# Altium PCB SZG-TEMPLATE-TXR.PcbDoc
Units mil, origin at the board's own origin, x right, y up, seen from the top; angles counter-clockwise.
Board outline 1968.5 x 2755.91 mil, 4 copper layers (L1-TOP, L2-GND, L3-PWR, L4-BOT), stack 59.85 mil thick; 29 components, 50 nets, 117 pads, 82 vias.
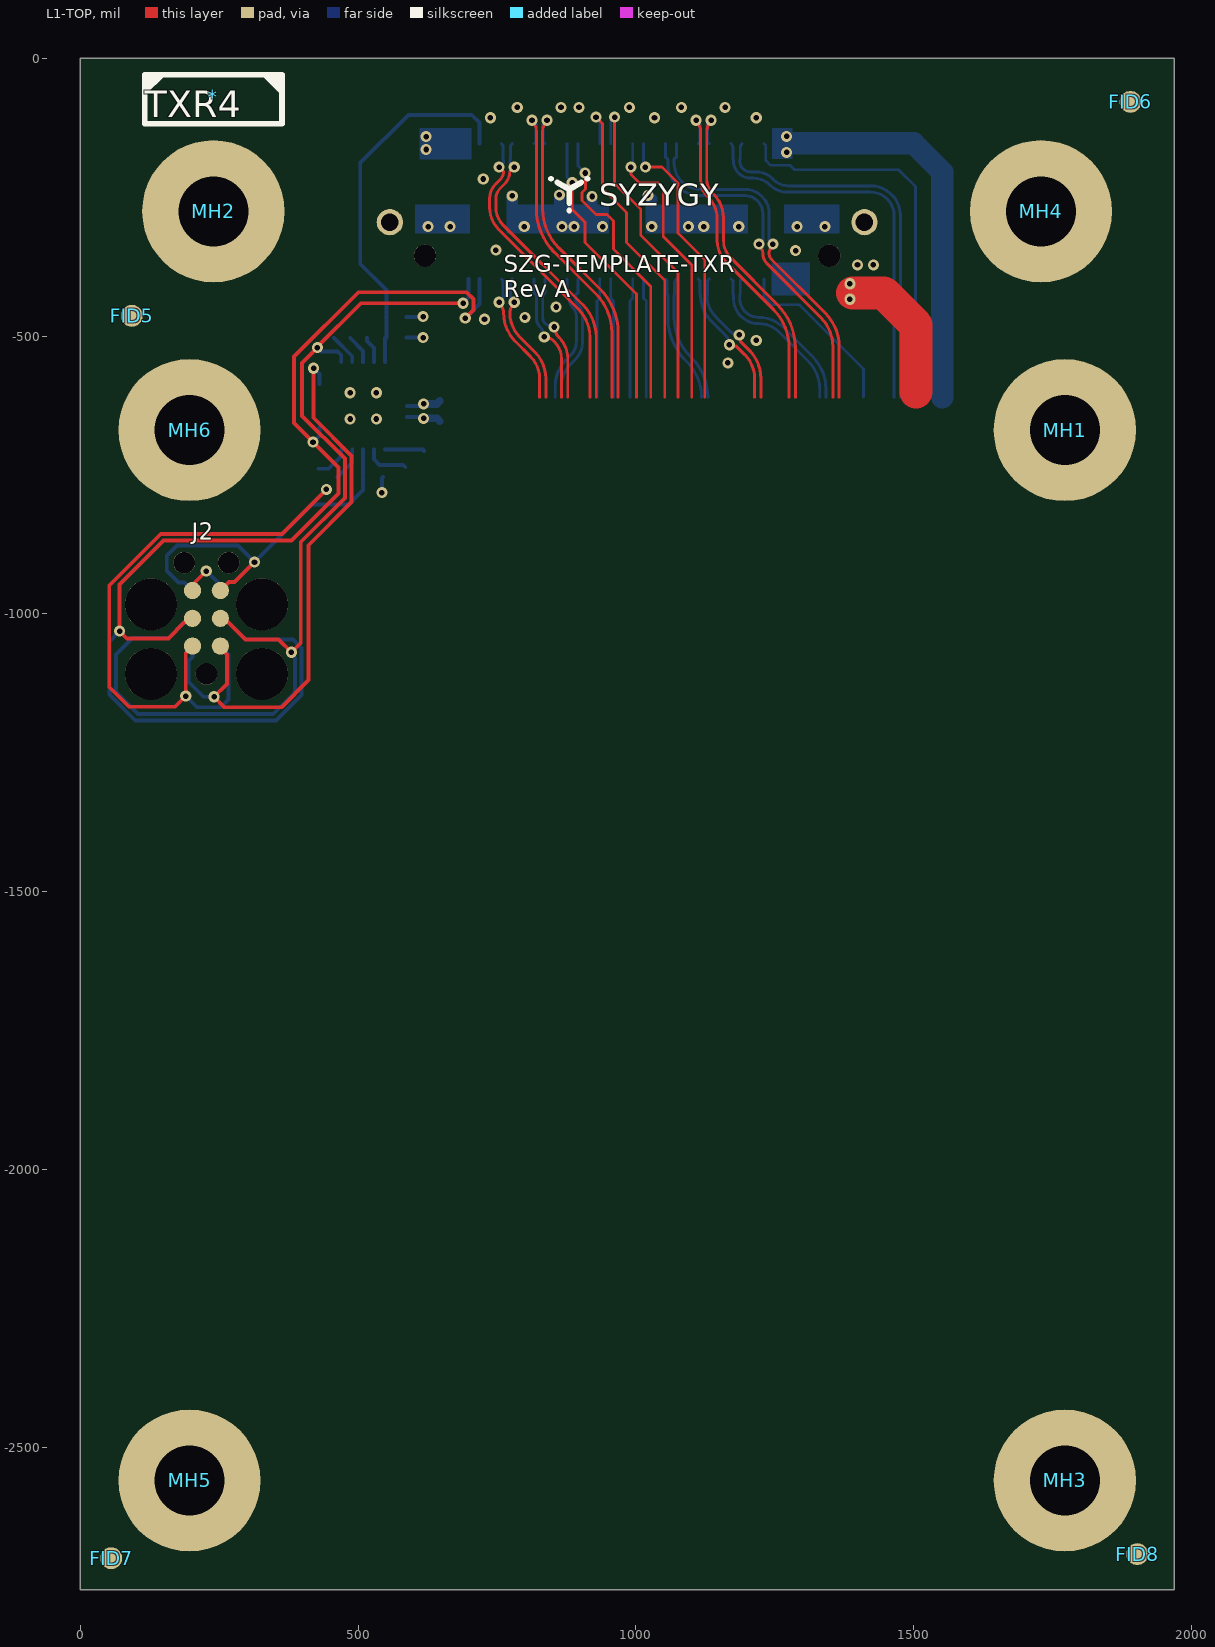
[diagram p0: L1-TOP view]
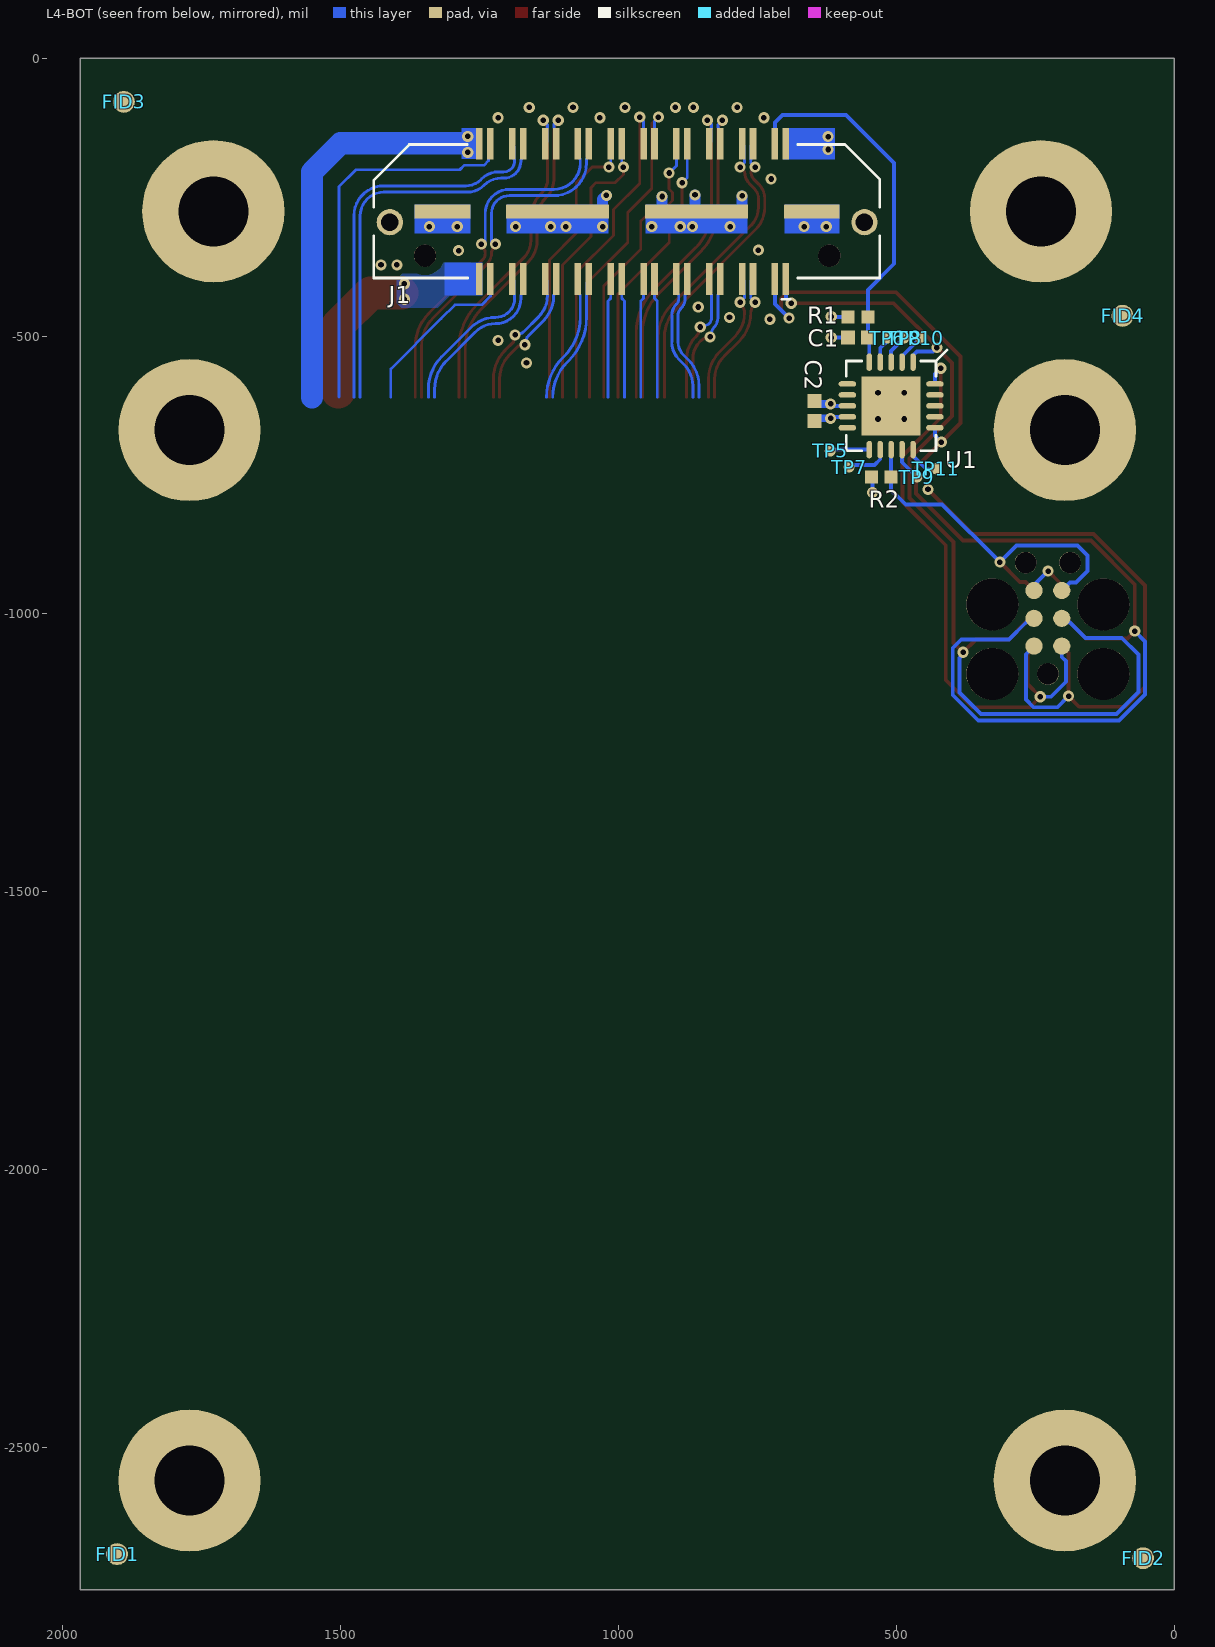
[diagram p1: L4-BOT view, seen from below]
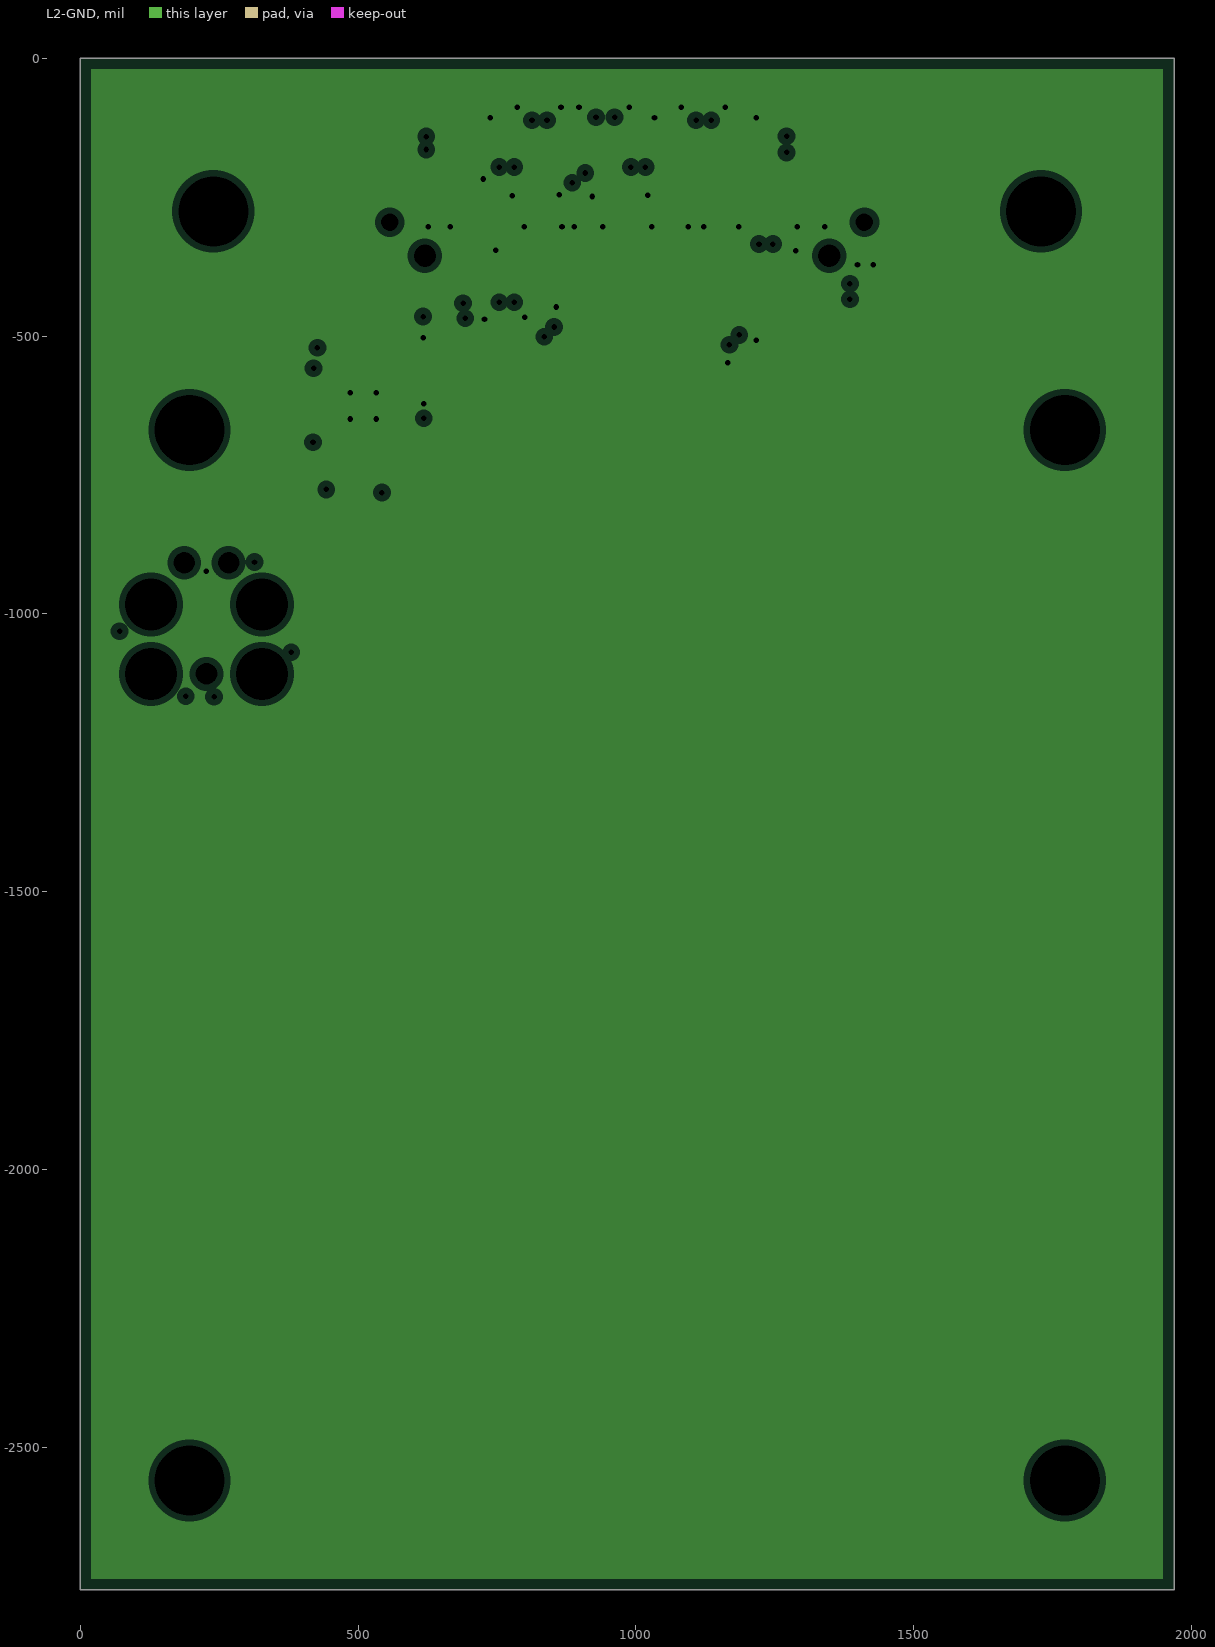
[diagram p2: L2-GND, clearances drawn from the general rule]
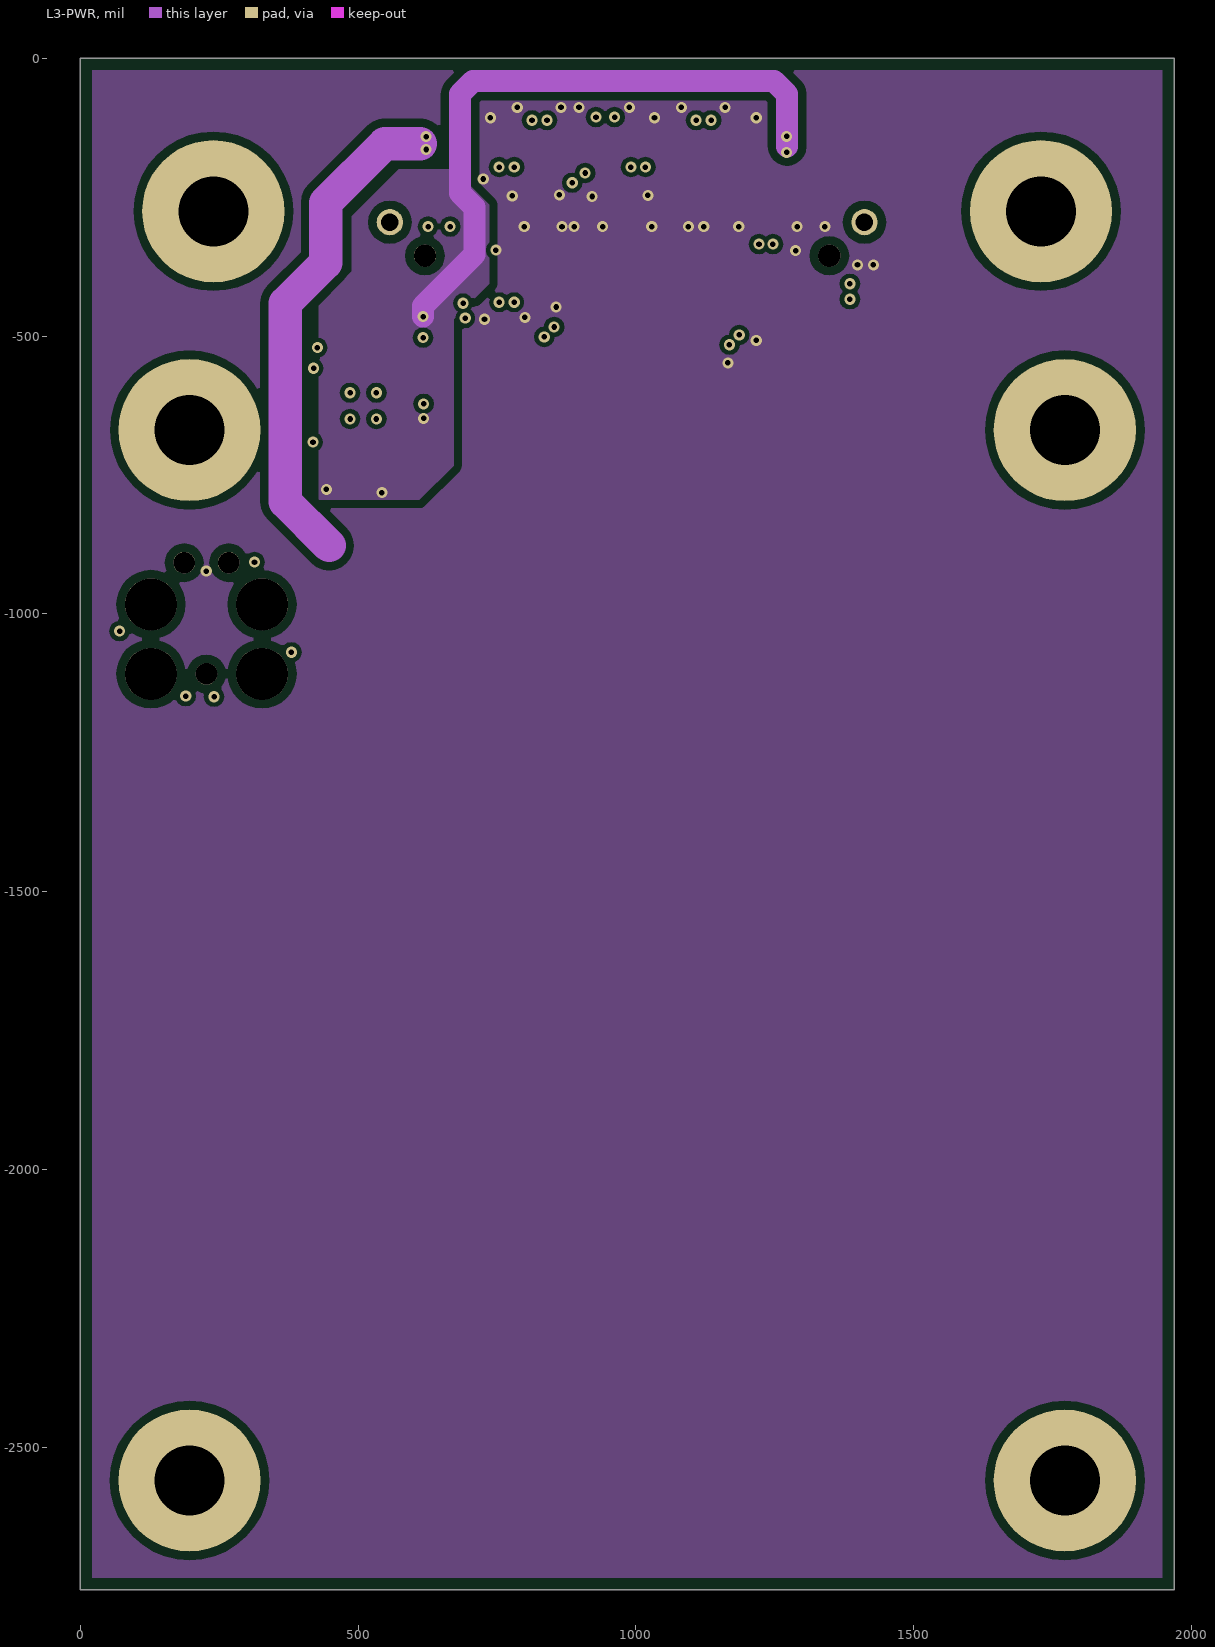
[diagram p3: L3-PWR]

## Layer stack, top to bottom
Top Solder: solder mask 0.8, Solder Resist, Dk 3.9
L1-TOP: signal copper 1.4
Dielectric1-2: prepreg 5.08, IT180A, Dk 4.2
L2-GND: plane copper 1.2, net GND
Dielectric2-3: core 44.49, IT180A, Dk 4.2
L3-PWR: signal copper 1.2
Dielectric3-4: prepreg 5.08, IT180A, Dk 4.2
L4-BOT: signal copper 1.4
Bottom Solder: solder mask 0.8, Solder Resist, Dk 3.9

## Board outline
0,-2755.91 1968.5,-2755.91 1968.5,0 0,0

## Design rules (kind name [scope] priority, off if disabled: settings)
AssemblyTestPointUsage [All] p1 off:
AssemblyTestpoint [All] p1 off: testpointundercomponent=TRUE minsize=40 maxsize=100 preferedsize=60 minholesize=0 maxholesize=40 preferedholesize=32 testpointgrid=1 usegrid=TRUE gridtolerance=0.01 allowsidetop=TRUE allowsidebottom=TRUE
Clearance ClearanceFiducial [Name Like 'FID*'] p1: gap=50 ignorepadtopadclearanceinfootprint=FALSE except(0: Arc-Hole Track-Hole SMDPad-Hole THPad-Hole Via-Hole Fill-Hole Poly-Hole Region-Hole Text-Hole) // Fiducial clearance.
Clearance [All] p2: gap=5 ignorepadtopadclearanceinfootprint=FALSE except(8: Via-Fill Via-Poly Via-Region; 12: Poly-Region Region-Region; 15: Arc-Poly Track-Poly SMDPad-Poly THPad-Poly Fill-Poly Poly-Poly)
ComponentClearance [All] p1 off: gap=10 collisioncheckmode=3 verticalgap=10 showdistances=FALSE
DiffPairsRouting okDiffRouting100ohm [All] p1: maxlimit=6 minlimit=6 mostfreqgap=6 toplayer_minwidth=5.25 toplayer_maxwidth=5.25 toplayer_prefwidth=5.25 midlayer1_minwidth=5.25 midlayer1_maxwidth=5.25 midlayer1_prefwidth=5.25 bottomlayer_minwidth=5.25 bottomlayer_maxwidth=5.25 bottomlayer_prefwidth=5.25 maxuncoupledlength=500 // Differential pair spacing for all 100ohm diff routes based on Gorilla Stackup.
FabricationTestPointUsage TestPointUsage [All] p1 off: valid=0 allowmultiple=FALSE
FabricationTestpoint Testpoint [All] p1: side=3 testpointundercomponent=TRUE minsize=20 maxsize=100 preferedsize=60 minholesize=0 maxholesize=40 preferedholesize=32 testpointgrid=1 allowsidetop=TRUE allowsidebottom=TRUE usegrid=TRUE gridtolerance=0.5
HoleSize [All] p1: absolutevalues=TRUE maxlimit=150 minlimit=10 maxpercent=80.000 minpercent=20.000
MatchedLengths Matched_SFP_DiffPair [InxSignalClass('xSignals_SFP')] p1: tolerance=10 checknetsindiffpair=TRUE checkdiffpairvsdiffpair=FALSE checkxsignals=FALSE checkothers=FALSE
MatchedLengths Matched_SFP1 [InxSignalClass('xSignals_SFP1')] p2: tolerance=185 checknetsindiffpair=FALSE checkdiffpairvsdiffpair=TRUE checkxsignals=TRUE checkothers=TRUE
MatchedLengths Matched_SFP2 [InxSignalClass('xSignals_SFP2')] p3: tolerance=185 checknetsindiffpair=FALSE checkdiffpairvsdiffpair=TRUE checkxsignals=TRUE checkothers=TRUE
MaximumViaCount okMaxViaDDR2Odt [InNetClass('okDDR2Data') Or InNetClass('okDDR2Masks') Or InNetClass('okDDR2Strobes')] p1: limit=2 // Set max via count of 2 for signals without external termination.
MaximumViaCount okMaxViaDDR2ExtTerm [InNetClass('okDDR2AddrCtrl') Or InNet('DRAM_C\K\') Or InNet('DRAM_CK')] p2: limit=3 // Set max via count of 3 for signals with external termination.
MinimumSolderMaskSliver [All] p1: minsoldermaskwidth=3
PlaneClearance [All] p1: clearance=11
PlaneConnect PlaneConnectNotVia [Not IsVia] p1: planeconnectstyle=Relief reliefexpansion=20 reliefentries=4 reliefconductorwidth=10 reliefairgap=10
PlaneConnect PlaneConnectVia [IsVia] p2: planeconnectstyle=Direct reliefexpansion=20 reliefentries=4 reliefconductorwidth=10 reliefairgap=10
PolygonConnect PolygonConnectVia [IsVia] p1: connectstyle=Direct reliefconductorwidth=8 reliefentries=4 polygonreliefangle="90 Angle" airgapwidth=10
PolygonConnect PolygonConnectNotVia [Not IsVia] p2: connectstyle=Relief reliefconductorwidth=10 reliefentries=4 polygonreliefangle="90 Angle" airgapwidth=10
RoutingVias [All] p1: holewidth=8 width=14 viastyle="Through Hole" minholewidth=8 minwidth=14 maxholewidth=40 maxwidth=60
SilkToSilkClearance [All] p1: silktosilkclearance=0.1
SilkToSolderMaskClearance SilkscreenOverComponentPads [IsPad] p1: minsilkscreentomaskgap=1 clearancetoexposedcopper=FALSE
SolderMaskExpansion [All] p1: expansion=2 istentingtop=FALSE
Width okWidthPower [InNetClass('okPower')] p1: maxlimit=100 minlimit=5 preferedwidth=16 minimp=50.000000 maximp=50.000000 favimp=50.000000
Width [All] p2: maxlimit=100 minlimit=3 preferedwidth=5 minimp=50.000000 maximp=50.000000 favimp=50.000000 // Non-Controlled routes
18 further rules are at their usual default settings.

## Classes and differential pairs
net class okPower: +3.3V VIO
differential pair DP_RX2: +RX2P -RX2N
differential pair DP_TX2: +TX2P -TX2N
differential pair DP_TX1: +TX1P -TX1N
differential pair DP_TX0: +TX0P -TX0N
differential pair DP_TX3: +TX3P -TX3N
differential pair DP_RX3: +RX3P -RX3N
differential pair DP_RX1: +RX1P -RX1N
differential pair DP_RX0: +RX0P -RX0N
differential pair DP_P2C_CLK: +P2C_CLKP -P2C_CLKN
differential pair DP_C2P_CLK: +C2P_CLKP -C2P_CLKN
differential pair DP_REFCLK: +REFCLKP -REFCLKN

## Components (designator, comment, footprint, x,y, rotation, side; value= is the part's Value field where it differs from the comment)
* "SZG Port Type Logo" SYZYGYPORTLOGO-TXR4 239.76,-70.87 r0 top
C1 "C0402C104K8PACTU" CAPC1005X06N 569,-503 r180 bottom value="0.1 u"
C2 "C0402C104K8PACTU" CAPC1005X06N 647.09,-635.13 r270 bottom value="0.1 u"
FID1 "FIDUCIAL" FID1MM/2MM-SS 1902.06,-2691.54 r90 bottom
FID2 "FIDUCIAL" FID1MM/2MM-SS 56,-2698.85 r90 bottom
FID3 "FIDUCIAL" FID1MM/2MM-SS 1889.76,-78.74 r90 bottom
FID4 "FIDUCIAL" FID1MM/2MM-SS 93,-463.68 r90 bottom
FID5 "FIDUCIAL" FID1MM/2MM-SS 93,-463.68 r90 top
FID6 "FIDUCIAL" FID1MM/2MM-SS 1889.76,-78.74 r90 top
FID7 "FIDUCIAL" FID1MM/2MM-SS 56,-2698.85 r90 top
FID8 "FIDUCIAL" FID1MM/2MM-SS 1902.06,-2691.54 r90 top
J1 "40-pin, ground protection in middle" QTH-020-01-X-D-DP-A-L 984.25,-275.59 r0 bottom locked
J2 "" TC2030-DUAL 227.36,-1107.87 r90 top
MH1 "MTG" MTG-3.2/6.5-PTH 1771.65,-669.29 r0 top locked
MH2 "MTG" MTG-3.2/6.5-PTH 239.76,-275.59 r0 top locked
MH3 "MTG" MTG-3.2/6.5-PTH 1771.65,-2559.06 r0 top locked
MH4 "MTG" MTG-3.2/6.5-PTH 1728.74,-275.59 r0 top locked
MH5 "MTG" MTG-3.2/6.5-PTH 196.85,-2559.06 r0 top locked
MH6 "MTG" MTG-3.2/6.5-PTH 196.85,-669.29 r0 top locked
R1 "CRCW040210K0FKED" RESC1005X06N 569,-465.74 r0 bottom value="10.0 k"
R2 "CRCW040210K0FKED" RESC1005X06N 527,-753.74 r0 bottom value="10.0 k"
TP5 "TESTPOINT-SMD20" TP-SMD20 619,-706.74 r90 bottom
TP6 "TESTPOINT-SMD20" TP-SMD20 516,-503.74 r90 bottom
TP7 "TESTPOINT-SMD20" TP-SMD20 585,-735.74 r90 bottom
TP8 "TESTPOINT-SMD20" TP-SMD20 486,-503.74 r90 bottom
TP9 "TESTPOINT-SMD20" TP-SMD20 463,-753.74 r90 bottom
TP10 "TESTPOINT-SMD20" TP-SMD20 457,-503.74 r90 bottom
TP11 "TESTPOINT-SMD20" TP-SMD20 429,-738.74 r90 bottom
U1 "ATTINY44A-MU" QFN-EP-20 509.32,-625.68 r270 bottom

## Footprints (in the part's own frame and the unit in brackets; to place one, negate y for a bottom-side part, rotate by r counter-clockwise, add the part's x,y. Pads: shape width x height; smd on the part's side, far side on the other; paste and mask are expansions set on the pad)
CAPC1005X06N [mm] "Chip Capacitor, 2-Leads, Body 1.00x0.50mm, IPC Medium Density"
  rect 0.64x0.64 smd: 1(-0.46,0) 2(0.46,0)
  body extent -0.55,-0.3 0.55,0.3, height 0.6
FID1MM/2MM-SS [mm] "Fiducial 1mm copper, 2mm soldermask, single-side"
  round 1 smd paste-0.5 mask+0.5: FID?(0,0)
MTG-3.2/6.5-PTH [mm] "Mounting hole, 3.2mm ID, 6.5mm OD, plated"
  round 6.5 hole 3.2: 1(0,0)
QFN-EP-20 [mm]
  oval 0.8x0.25 smd mask+0.051: 1(-2,1) 2(-2,0.5) 3(-2,0) 4(-2,-0.5) 5(-2,-1) 11(2,-1) 12(2,-0.5) 13(2,0) 14(2,0.5) 15(2,1)
  oval 0.25x0.8 smd mask+0.051: 6(-1,-2) 7(-0.5,-2) 8(0,-2) 9(0.5,-2) 10(1,-2) 16(1,2) 17(0.5,2) 18(0,2) 19(-0.5,2) 20(-1,2)
  rect 2.7x2.7 smd paste-100 mask+0.051: PAD(0,0)
  silkscreen extent -2.55,-2.05 2.05,2.55
QTH-020-01-X-D-DP-A-L [mm] "0.5mm hi-speed, high-density header (female), 80-pin, latching, ground protection in middle"
  rect 2.54x0.64 smd mask+0.051: 0(-8.44,0) 0(8.44,0)
  rect 4.7x0.64 smd mask+0.051: 0(-3.17,0) 0(3.18,0)
  rect 0.3x1.45 smd mask+0.051: 1(-7.25,3.09) 2(-7.25,-3.09) 3(-6.75,3.09) 4(-6.75,-3.09) 5(-5.75,3.09) 6(-5.75,-3.09) 7(-5.25,3.09) 8(-5.25,-3.09) 9(-4.25,3.09) 10(-4.25,-3.09) 11(-3.75,3.09) 12(-3.75,-3.09) 13(-2.75,3.09) 14(-2.75,-3.09) 15(-2.25,3.09) 16(-2.25,-3.09) 17(-1.25,3.09) 18(-1.25,-3.09) 19(-0.75,3.09) 20(-0.75,-3.09) 21(0.25,3.09) 22(0.25,-3.09) 23(0.75,3.09) 24(0.75,-3.09) 25(1.75,3.09) 26(1.75,-3.09) 27(2.25,3.09) 28(2.25,-3.09) 29(3.25,3.09) 30(3.25,-3.09) 31(3.75,3.09) 32(3.75,-3.09) 33(4.75,3.09) 34(4.75,-3.09) 35(5.25,3.09) 36(5.25,-3.09) 37(6.25,3.09) 38(6.25,-3.09) 39(6.75,3.09) 40(6.75,-3.09)
  round 1.2 hole 0.8 paste+0: MH(-10.845,0.5) MH(10.845,0.5)
  round 1.02 hole 1.02 unplated paste+0: MH(-9.24,2.03) MH(9.24,2.03)
  silkscreen extent -11.55,-3.05 11.58,4.01
RESC1005X06N [mm] "Chip Resistor, 2-Leads, Body 1.00x0.50mm, IPC Medium Density"
  rect 0.6x0.6 smd: 1(-0.45,0) 2(0.45,0)
  body extent -0.55,-0.3 0.55,0.3, height 0.6
SYZYGYPORTLOGO-TXR4 [mil] "Logo for the SYZYGY TXR4 Port type"
  silkscreen extent -124,-47 124,41
TC2030-DUAL [mil]
  round 31 smd paste-393.7: 1(50,-25) 2(50,25) 3(100,-25) 4(100,25) 5(150,-25) 6(150,25)
  round 31 smd far side paste-393.7: 1(50,25) 2(50,-25) 3(100,25) 4(100,-25) 5(150,25) 6(150,-25)
  round 39 hole 39 unplated: A(0,0) B(200,40) C(200,-40)
  round 93.5 hole 93.5 unplated: D(0,-100) E(125,-100) F(0,100) G(125,100)
TP-SMD20 [mil] "Test point, surface-mount, 20mil"
  round 20 smd paste-78.74: 1(0,0)

## Part data
*: library part "SYZYGY Port Type Logo", "SYZYGY Port Type Logo", PartNumber=ALIGNI_IGNORE
C1 C2: library part 000070, "Ceramic capacitor", Manufacturer=Kemet, Tolerance (%)=10, ValueFloat=1E-7, Description 2="SM-0402, 10%, 10v", Manufacturer_PN=C0402C104K8PACTU, PartNumber=000070
  C1: updated_on="5/15/2017 4:50:04 PM"
  C2: updated_on="11/17/2016 12:16:56 PM"
FID1 FID2 FID3 FID4 FID5 FID6 FID7 FID8: "PCB fiducial"
J1: library part 001605, "0.5mm hi-speed, high-density header (female)", Manufacturer=Samtec, Manufacturer_PN=QTH-020-01-F-D-DP-A, AligniPartNumber=001605, parttype=Connector
J2: library part 002062, "Tag-Connect 6-pin Plug-of-Nails spring-pin cable footprint", Manufacturer=Tag-Connect, Manufacturer_PN=TC2030-IDC, AligniPartNumber=002062, parttype=Connector
MH1 MH2 MH3 MH4 MH5 MH6: "Mounting hole"
R1 R2: library part 001521, "Thick-film resistor", Manufacturer=Vishay, Tolerance (%)=1, ValueFloat=10000, Description 2="SM-0402, 1%, 1/16W", Manufacturer_PN=CRCW040210K0FKED, PartNumber=001521, updated_on="3/21/2017 2:29:49 PM", x_lifecycle_status=Production
TP5 TP6 TP7 TP8 TP9 TP10 TP11: "Test point, surface-mount, 20mil"
U1: library part 001552, "8-bit MCU, 4 KB flash, 256 bytes EEPROM", Manufacturer=Microchip, Manufacturer_PN=ATTINY44A-MU, PartNumber=001552, updated_on="5/23/2017 10:51:21 AM", x_lifecycle_status=Production

## Via types
v1: diameter 20, hole 10, L1-TOP to L4-BOT, tented both sides, 82 vias

## Nets (pads, with @x,y where several pads share a name; then routed paths per layer and width w, separated by ;. In a path a pad name is that pad's centre, name@x,y a point inside that pad or via, vN(x,y) a via of type N, cw(c..) or ccw(c..) an arc to the next point about the centre after c; other vN are vias at no path point)
+3.3V: C2.2 J1.40 J2.2 R1.2 R2.2 U1.9 | length 3069.5
  L1-TOP w7: J2.2@202.36,-1057.87 190,-1070.24 v1(190,-1148) 171,-1167 88,-1167 52.5,-1131.5 52.5,-948.53 145.03,-856 363,-856 v1(443,-776)
  L3-PWR w40: v1(617,-465) 617,-446 709.45,-353.55 709.45,-268.51 683.53,-242.58 683.53,-64.76 706.96,-41.33 1248.57,-41.33 1272,-64.76 1272,-159
  L4-BOT w7: v1(190,-1148) 209.98,-1167.98 253.02,-1167.98 267,-1154 267,-1072.51 J2.2@252.36,-1057.87 ; v1(543,-781.74) 543,-755.46 R2.2 ; R1.2 v1@614,-465.74 ; U1.9 615.33,-645.36 v1(618.09,-648.13)
  L4-BOT w14: v1(618.09,-648.13) 641.98,-648.13 C2.2
  L4-BOT w40: 1271.65,-153.36 1499.81,-153.36 1551.18,-204.72 1551.18,-610.24
  other v1: 1271,-169.74 1271,-140.74
+5V: J1.2 | length 894
  L3-PWR w60: 448,-877 369,-798 369,-441 442,-368 442,-260 547.97,-154.03 612.18,-154.03
  other v1: 622.65,-164.5 622.65,-141.21
C2P_CLKN: J1.36 | length 696.8
  L4-BOT w5.25: J1.36 ccw(c1198.86,-161.86) 1187.66,-161.86 1187.66,-181.33 cw(c1186.06,-181.33) 1187.2,-182.46 ccw(c1188.33,-183.59) 1186.73,-183.59 1186.73,-185.04 ccw(c1206.41,-185.04) 1206.41,-204.72 1215.75,-204.72 cw(c1215.75,-247.69) 1246.13,-217.31 1247.48,-218.66 ccw(c1274.61,-191.53) 1274.61,-229.89 1422.24,-229.89 cw(c1422.24,-283.46) 1475.82,-283.46 1475.82,-610.24
C2P_CLKP: J1.34 | length 696.6
  L4-BOT w5.25: J1.34 cw(c1163.34,-161.86) 1174.54,-161.86 1174.54,-181.33 ccw(c1176.14,-181.33) 1175.01,-182.46 cw(c1173.88,-183.59) 1175.48,-183.59 1175.48,-185.04 ccw(c1206.41,-185.04) 1206.41,-215.97 1211.09,-215.97 cw(c1211.09,-258.94) 1241.47,-228.56 ccw(c1271.85,-198.18) 1271.85,-241.14 1422.24,-241.14 cw(c1422.24,-283.46) 1464.57,-283.46 1464.57,-610.24
GND: C1.1 C2.1 J1.0 J2.6 U1.8 U1.PAD | length 501.3
  L1-TOP w7: J2.6@202.36,-957.87 206.96,-953.28 206.96,-943.05 v1(227,-923)
  L4-BOT w7: v1(227,-923) 247.77,-943.77 247.77,-953.28 J2.6@252.36,-957.87 ; C1.1 v1(617,-503) ; U1.8 614.54,-625.68 v1(618.09,-622.13)
  L4-BOT w14: v1(618.09,-622.13) 641.98,-622.13 C2.1
  L4-BOT w20: v1(777.56,-248.03) 777.56,-272.99 780.16,-275.59 859.45,-275.59 J1.0@864.17,-275.59 ; v1(862.2,-246.06) 862.2,-273.62 J1.0@864.17,-275.59 ; J1.0@918.66,-275.59 J1.0@864.17,-275.59 ; v1(921.26,-249.02) 921.26,-284.41 v1(940,-303.15) ; v1(1021.65,-247.05) 1028.44,-253.84 v1(1028.44,-303.15)
  other v1: 485.69,-649.3 532.94,-649.3 485.69,-602.06 532.94,-602.06 1165.35,-548.23 1216.54,-507.87 727.6,-469.92 800.2,-466.54 856.3,-447.83 1398.62,-372.05 1427.17,-372.05 1287.4,-346.46 748.03,-345.47 626,-303.12 665.81,-303.12 799,-303.15 867,-303.28 888.78,-303.28 1094.49,-303.15 1122.05,-303.15 1185,-303.15 1290,-303.15 1340,-303.15 725.39,-217.52 738.19,-107.28 1033.46,-107.28 1216.54,-107.28 786.42,-88.58 865.16,-88.58 897.64,-88.58 988.19,-88.58 1081.69,-88.58 1160.43,-88.58
MCU_MISO: J2.1 U1.20 | length 1082.2
  L1-TOP w7: J2.1@252.36,-1057.87 252.36,-1061.47 264,-1073.11 264,-1126 v1(241,-1149) 260,-1168 362,-1168 411,-1119 411,-876.4 488.57,-798.83 488.57,-715.69 420,-647.12 v1(420,-558)
  L4-BOT w7: J2.1@202.36,-1057.87 202.36,-1077.64 195,-1085 195,-1122 222,-1149 v1(241,-1149) ; v1(420,-558) 430.57,-568.57 U1.20
MCU_RESET_B: J2.5 R2.1 U1.13 | length 666.3
  L1-TOP w7: J2.5@252.36,-957.87 267.83,-942.41 277.87,-942.41 313.52,-906.76 v1(313.75,-906.76)
  L4-BOT w7: J2.5@202.36,-957.87 202.06,-957.87 187.66,-943.48 176.91,-943.48 156,-922.57 156,-895 174,-877 284,-877 v1(313.75,-906.76) 417.51,-803 483,-803 509.28,-776.72 R2.1 ; R2.1@509.32,-749.71 U1.13
MCU_SCL_USCK: J1.1 J2.3 U1.1 | length 1851
  L1-TOP w7: J2.3@252.36,-1007.87 258.86,-1007.87 266.67,-1015.68 267.32,-1015.68 297.64,-1046 357,-1046 v1(380,-1069) 397,-1052 397,-870.72 476.57,-791.15 476.57,-720.66 399.53,-643.62 399.53,-548.47 v1(427,-521) ; v1@425.26,-521 505.26,-441 v1(689,-441)
  L4-BOT w7: J2.3@202.36,-1007.87 195.87,-1007.87 188.23,-1015.51 187.23,-1015.51 159.43,-1043.31 94.49,-1043.31 64.6,-1073.19 64.6,-1140.34 104.24,-1179.98 347.6,-1179.98 386.5,-1141.08 386.5,-1079.02 380,-1072.52 v1(380,-1069) ; v1(427,-521) 433.74,-527.74 463,-527.74 469.94,-534.69 U1.1 ; v1(689,-441) 698.82,-431.18 J1.1
MCU_SDA_MOSI: J1.3 J2.4 U1.16 | length 2264.5
  L1-TOP w7: J2.4@202.36,-1007.87 195.87,-1007.87 188.23,-1015.51 187.23,-1015.51 158.74,-1044 84,-1044 v1(71,-1031) 71,-947 150,-868 380.03,-868 464.57,-783.46 464.57,-736.57 v1(419,-691) 384.75,-656.75 384.75,-537.08 500.58,-421.26 695.42,-421.26 707.5,-433.34 707.5,-453.34 v1(692.91,-467.92)
  L4-BOT w7: v1(71,-1031) 52.6,-1049.4 52.6,-1145.31 99.27,-1191.98 352.57,-1191.98 398.5,-1146.05 398.5,-1061.34 383.16,-1046 297.39,-1046 267.2,-1015.81 266.79,-1015.81 258.86,-1007.87 J2.4@252.36,-1007.87 ; v1(419,-691) 430.57,-679.43 U1.16 U1.16@430.27,-664.74 ; v1(692.91,-467.92) 718.5,-442.33 J1.3
NetTP5_1: TP5.1 U1.11 | length 71.3
  L4-BOT w7: U1.11 616.68,-704.42 TP5.1
NetTP6_1: TP6.1 U1.4 | length 48.6
  L4-BOT w7: TP6.1 516,-508.74 529,-521.74 U1.4
NetTP7_1: TP7.1 U1.12 | length 79.1
  L4-BOT w7: U1.12 529,-721.74 539,-731.74 581,-731.74 TP7.1
NetTP8_1: TP8.1 U1.3 | length 52.9
  L4-BOT w7: TP8.1 509.32,-527.06 U1.3
NetTP9_1: TP9.1 U1.14 | length 60.4
  L4-BOT w7: TP9.1 489.63,-727.11 U1.14
NetTP10_1: TP10.1 U1.2 | length 56.7
  L4-BOT w7: TP10.1 489.63,-536.37 U1.2
NetTP11_1: TP11.1 U1.15 | length 61.8
  L4-BOT w7: TP11.1 447,-738.74 469.94,-715.8 U1.15
P2C_CLKN: J1.35 | length 293.5
  L4-BOT w5.25: J1.35 1187.66,-400.52 1187.66,-425.3 1186.73,-426.24 1186.73,-432.23 ccw(c1221.04,-432.23) 1221.04,-466.54 1221.48,-466.54 cw(c1221.48,-528.64) 1265.4,-484.73 1317.61,-536.93 cw(c1258.82,-595.72) 1341.96,-595.72 1341.96,-610.24
P2C_CLKP: J1.33 | length 293.5
  L4-BOT w5.25: J1.33 1174.54,-400.52 1174.54,-425.3 1175.48,-426.24 1175.48,-432.29 ccw(c1220.97,-432.29) 1220.97,-477.79 1221.46,-477.79 cw(c1221.46,-528.71) 1257.46,-492.7 1309.55,-544.78 cw(c1258.46,-595.87) 1330.71,-595.87 1330.71,-610.24
R_GA: C1.2 J1.4 R1.1 U1.5 | length 672.1
  L4-BOT w7: U1.5 C1.2@548.69,-503.34 ; R1.1@550.69,-466.34 R1.1@551.18,-465.84 ; C1.2 551.18,-502.71 R1.1@551.18,-465.84 ; R1.1 R1.1@551.18,-465.84 ; J1.4 718.5,-116.14 704.72,-102.36 590.55,-102.36 503.94,-188.98 503.94,-370.08 551.18,-417.32 R1.1@551.18,-465.84
REFCLKN: J1.15 | length 230.2
  L4-BOT w5.25: 866.14,-610.24 866.14,-589.48 cw(c920.19,-589.48) 881.97,-551.26 890.96,-542.27 ccw(c859.57,-510.87) 903.97,-510.87 903.97,-462.91 ccw(c875.73,-462.91) 895.7,-442.94 ; 895.67,-442.91 cw(c905.85,-432.73) 891.45,-432.73 891.45,-427.45 cw(c895.67,-427.45) 895.67,-423.23 J1.15
REFCLKP: J1.13 | length 230.2
  L4-BOT w5.25: 854.89,-610.24 854.89,-589.38 cw(c919.96,-589.38) 873.95,-543.37 882.97,-534.35 ccw(c859.45,-510.83) 892.72,-510.83 892.72,-462.94 ccw(c875.64,-462.94) 887.71,-450.87 887.67,-450.82 cw(c905.69,-432.8) 880.2,-432.8 880.2,-427.45 ccw(c875.98,-427.45) 875.98,-423.23 J1.13
RSVD_37: J1.37 | length 315.1
  L4-BOT w5: J1.37 1230.32,-428.29 1245.93,-443.9 1294.29,-443.9 1318.86,-468.46 1409.45,-559.06 1409.45,-609.85
RSVD_38: J1.38 | length 699.2
  L4-BOT w5: J1.38 1233.72,-157.34 1233.72,-184.51 1242.13,-192.91 1277.56,-192.91 1285.43,-200.79 1472.44,-200.79 1502.95,-231.3 1502.95,-609.94
RX0N: J1.7 | length 241.5
  L1-TOP w5.25: v1(781,-439.31) cw(c774.78,-439.31) 779.18,-443.7 ccw(c793.79,-458.32) 773.13,-458.32 ccw(c834.53,-458.32) 791.11,-501.74 818.06,-528.69 cw(c769.87,-576.88) 838.02,-576.88 838.02,-610.24
  L4-BOT w5.25: J1.7 774.28,-400.52 774.28,-425.15 773.13,-426.31 773.13,-431.43 v1(781,-439.31)
RX0P: J1.5 | length 241.3
  L1-TOP w5.25: v1(754,-439.31) ccw(c760.22,-439.31) 755.82,-443.7 cw(c741.21,-458.32) 761.88,-458.32 761.88,-458.38 ccw(c834.38,-458.38) 783.11,-509.65 810.03,-536.57 cw(c769.61,-576.99) 826.77,-576.99 826.77,-610.24
  L4-BOT w5.25: v1(754,-439.31) 761.88,-431.43 761.88,-426.31 761.15,-425.59 761.15,-400.52 J1.5
RX1N: J1.11 | length 234.8
  L1-TOP w5.25: v1(852.79,-483.82) cw(c846.69,-489.92) 855.32,-489.92 ccw(c870.16,-489.92) 859.67,-500.42 861.3,-502.05 cw(c822.46,-540.89) 877.39,-540.89 877.39,-610.24
  L4-BOT w5.25: J1.11 836.61,-423.23 ccw(c836.61,-427.45) 832.4,-427.45 832.4,-467.38 ccw(c846.3,-467.38) 836.47,-477.22 ccw(c846.3,-467.38) 846.3,-481.29 846.69,-481.29 cw(c846.69,-489.92) v1(852.79,-483.82)
RX1P: J1.9 | length 234.8
  L1-TOP w5.25: v1(835.12,-501.5) ccw(c841.22,-495.39) 841.22,-504.03 cw(c841.22,-518.87) 851.71,-508.37 853.27,-509.92 cw(c822.18,-541.01) 866.14,-541.01 866.14,-610.24
  L4-BOT w5.25: J1.9 816.93,-423.23 cw(c816.93,-427.45) 821.15,-427.45 821.15,-467.77 ccw(c845.37,-467.77) 828.24,-484.9 cw(c817.75,-495.39) 832.59,-495.39 ccw(c841.22,-495.39) v1(835.12,-501.5)
RX2N: J1.31 | length 257.2
  L1-TOP w5.25: v1(1185.96,-498.09) 1188.49,-500.62 1188.49,-510.34 1203.85,-525.7 cw(c1153.18,-576.36) 1224.83,-576.36 1224.83,-610.24
  L4-BOT w5.25: J1.31 1128.61,-400.52 1128.61,-425.3 1127.67,-426.24 1127.67,-427.26 ccw(c1181.41,-427.26) 1143.41,-465.26 1170.77,-492.62 ; 1170.78,-492.63 ccw(c1177.17,-486.22) 1177.17,-495.27 1179.15,-495.27 cw(c1179.15,-504.9) v1(1185.96,-498.09) v1@1184.06,-500
RX2P: J1.29 | length 257.2
  L1-TOP w5.25: v1(1168.29,-515.77) 1170.81,-518.3 1180.54,-518.3 1195.79,-533.55 cw(c1152.82,-576.51) 1213.58,-576.51 1213.58,-610.24
  L4-BOT w5.25: J1.29 1115.49,-400.52 1115.49,-425.3 1116.42,-426.24 1116.42,-427.33 ccw(c1181.25,-427.33) 1135.41,-473.17 1162.81,-500.57 cw(c1156.41,-506.97) 1165.46,-506.97 1165.46,-508.96 ccw(c1175.1,-508.96) v1(1168.29,-515.77) v1@1170.19,-513.86
RX3N: J1.27 | length 230.6
  L4-BOT w5.25: J1.27 ccw(c1080.75,-405.16) 1069.55,-405.16 1069.55,-424.64 cw(c1067.95,-424.64) 1069.09,-425.77 ccw(c1070.22,-426.9) 1068.62,-426.9 1068.62,-466.17 ccw(c1168.62,-466.17) 1078.05,-508.57 ccw(c1168.62,-466.17) 1085.5,-521.78 ccw(c1168.62,-466.17) 1097.91,-536.88 1099.82,-538.79 cw(c1028.5,-610.12) 1129.36,-610.12 1129.36,-610.24
RX3P: J1.25 | length 230.6
  L4-BOT w5.25: J1.25 cw(c1045.23,-405.16) 1056.43,-405.16 1056.43,-424.64 ccw(c1058.03,-424.64) 1056.9,-425.77 cw(c1055.77,-426.9) 1057.37,-426.9 1057.37,-466.2 ccw(c1168.55,-466.2) 1089.93,-544.82 1091.78,-546.66 cw(c1028.21,-610.24) 1118.11,-610.24
S0: J1.14 | length 508.1
  L1-TOP w5: v1(885.36,-224.23) 885.36,-272.17 908.46,-295.28 908.46,-331.58 1000.98,-424.1 1000.98,-610.24
  L4-BOT w5: J1.14 875.98,-214.86 v1(885.36,-224.23)
S1: J1.16 | length 527.2
  L1-TOP w5: v1(908.67,-206.77) 909.04,-207.13 909.04,-235.48 902.89,-241.62 902.89,-256.35 928.03,-281.5 947.83,-281.5 959.65,-293.31 959.65,-343.5 1026.57,-410.43 1026.57,-610.24
  L4-BOT w5: J1.16 895.67,-193.77 v1(908.67,-206.77)
S2: J1.17 | length 215
  L4-BOT w5: 930.12,-610.24 930.12,-437.01 935.04,-432.09 J1.17
S3: J1.18 | length 605.7
  L1-TOP w5: v1(928.15,-106.3) 939.96,-118.11 939.96,-234.66 983.27,-277.97 983.27,-331.69 1052,-400.42 1052,-610.24
  L4-BOT w5: v1(928.15,-106.3) 935.04,-113.19 J1.18
S4: J1.19 | length 215
  L4-BOT w5: J1.19 954.72,-432.09 959.65,-437.01 959.65,-610.24
S5: J1.20 | length 601.7
  L1-TOP w5: v1(961.61,-106.3) 961.61,-225.39 1008.86,-272.64 1008.86,-318.9 1075.79,-385.83 1075.79,-610.24
  L4-BOT w5: J1.20 954.72,-113.19 v1(961.61,-106.3)
S6: J1.21 | length 215
  L4-BOT w5: 989.17,-610.24 989.17,-437.01 994.09,-432.09 J1.21
S7: J1.22 | length 523
  L1-TOP w5: v1(991.07,-196) 991.07,-209.57 1005.61,-224.11 1040.06,-224.11 1049.21,-233.27 1049.21,-320.87 1100.39,-372.05 1100.39,-610.24
  L4-BOT w5: v1(991.07,-196) 994.09,-192.98 J1.22
S8: J1.23 | length 215
  L4-BOT w5: J1.23 1013.78,-432.09 1018.7,-437.01 1018.7,-610.24
S9: J1.24 | length 519.6
  L1-TOP w5: v1(1017.07,-196) 1047.11,-196 1075.79,-224.68 1075.79,-314.96 1124.02,-363.19 1124.02,-610.24
  L4-BOT w5: J1.24 1013.78,-192.71 v1(1017.07,-196)
TX0N: J1.8 | length 541.8
  L1-TOP w5.25: v1(781,-196) 773,-204 cw(c740.84,-204) 763.58,-226.74 755.49,-234.83 ccw(c773.51,-252.84) 748.03,-252.84 748.03,-268.61 ccw(c793.4,-268.61) 761.32,-300.69 904.15,-443.52 cw(c845.18,-502.49) 928.57,-502.49 928.57,-610.24
  L4-BOT w5.25: J1.8 774.28,-157.22 774.28,-181.85 773.13,-183 773.13,-188.12 v1(781,-196)
TX0P: J1.6 | length 541.5
  L1-TOP w5.25: v1(754,-196) 761.75,-203.75 cw(c740.24,-203.75) 755.45,-218.96 747.52,-226.89 ccw(c773.45,-252.82) 736.78,-252.82 736.78,-268.66 ccw(c793.28,-268.66) 753.33,-308.61 896.08,-451.36 cw(c844.8,-502.64) 917.32,-502.64 917.32,-610.24
  L4-BOT w5.25: v1(754,-196) 761.88,-188.12 761.88,-183 761.15,-182.28 761.15,-157.22 J1.6
TX1N: J1.12 | length 594.8
  L1-TOP w5.25: v1(840.06,-111.87) cw(c833.84,-111.87) 838.23,-116.27 ccw(c852.85,-130.89) 832.18,-130.89 832.18,-271.1 ccw(c931.57,-271.1) 861.29,-341.38 935.49,-415.58 cw(c857.14,-493.93) 967.94,-493.93 967.94,-610.24
  L4-BOT w5.25: J1.12 833.33,-150.66 833.33,-126.03 832.18,-124.87 832.18,-119.75 v1(840.06,-111.87)
TX1P: J1.10 | length 594.6
  L1-TOP w5.25: v1(813.06,-111.87) ccw(c819.27,-111.87) 814.88,-116.27 cw(c800.26,-130.89) 820.93,-130.89 820.93,-271.14 ccw(c931.48,-271.14) 853.31,-349.31 927.4,-423.4 cw(c856.69,-494.11) 956.69,-494.11 956.69,-610.24
  L4-BOT w5.25: v1(813.06,-111.87) 820.93,-119.75 820.93,-124.87 820.21,-125.59 820.21,-150.66 J1.10
TX2N: J1.32 | length 602.9
  L1-TOP w5.25: v1(1135.33,-111.87) cw(c1129.11,-111.87) 1133.51,-116.27 ccw(c1148.13,-130.89) 1127.46,-130.89 1127.46,-218.48 ccw(c1160.72,-218.48) 1137.2,-242 1139.65,-244.45 cw(c1096.6,-287.5) 1157.48,-287.5 1157.48,-327.98 ccw(c1201.71,-327.98) 1170.43,-359.25 1254.32,-443.14 cw(c1175.82,-521.64) 1286.84,-521.64 1286.84,-610.24
  L4-BOT w5.25: J1.32 1128.61,-150.66 1128.61,-126.03 1127.46,-124.87 1127.46,-119.75 v1(1135.33,-111.87)
TX2P: J1.30 | length 602.6
  L1-TOP w5.25: v1(1108.33,-111.87) ccw(c1114.55,-111.87) 1110.15,-116.27 cw(c1095.54,-130.89) 1116.21,-130.89 1116.21,-218.52 ccw(c1160.61,-218.52) 1129.21,-249.92 1130.78,-251.49 cw(c1093.48,-288.79) 1146.23,-288.79 1146.23,-328.01 ccw(c1201.62,-328.01) 1162.45,-367.18 1246.3,-451.03 cw(c1175.59,-521.74) 1275.59,-521.74 1275.59,-610.24
  L4-BOT w5.25: v1(1108.33,-111.87) 1116.21,-119.75 1116.21,-124.87 1115.49,-125.59 1115.49,-150.66 J1.30
TX3N: J1.28 | length 644.4
  L1-TOP w5.25: v1(1246.47,-334.65) cw(c1237.84,-334.65) 1243.94,-340.75 ccw(c1254.44,-351.24) 1239.6,-351.24 ccw(c1255.2,-351.24) 1244.17,-362.28 1340.58,-458.69 cw(c1280.21,-519.05) 1365.58,-519.05 1365.58,-610.24
  L4-BOT w5.25: J1.28 1072.83,-179.13 ccw(c1072.83,-183.35) 1068.62,-183.35 1068.62,-188.98 ccw(c1115.86,-188.98) 1115.86,-236.22 1196.29,-236.22 cw(c1196.29,-279.53) 1239.6,-279.53 1239.6,-327.77 ccw(c1246.47,-327.77) v1(1246.47,-334.65)
TX3P: J1.26 | length 644.4
  L1-TOP w5.25: v1(1221.47,-334.65) ccw(c1230.1,-334.65) 1224,-340.75 cw(c1213.51,-351.24) 1228.35,-351.24 1228.35,-351.32 ccw(c1255.01,-351.32) 1236.16,-370.18 1332.6,-466.62 cw(c1280.12,-519.09) 1354.33,-519.09 1354.33,-610.24
  L4-BOT w5.25: J1.26 1053.15,-179.13 cw(c1053.15,-183.35) 1057.37,-183.35 1057.37,-188.98 ccw(c1115.86,-188.98) 1115.86,-247.47 1196.29,-247.47 cw(c1196.29,-279.53) 1228.35,-279.53 1228.35,-327.77 cw(c1221.47,-327.77) v1(1221.47,-334.65)
VIO: J1.39 | length 258.3
  L1-TOP w60: 1389.76,-422.51 1446.13,-422.51 1503.94,-480.31 1503.94,-600.51
  other v1: 1384.99,-433.95 1384.99,-405.95
pads on no net: FID1.FID? FID2.FID? FID3.FID? FID4.FID? FID5.FID? FID6.FID? FID7.FID? FID8.FID? J1.MH J2.A J2.B J2.C J2.D J2.E J2.F J2.G MH1.1 MH2.1 MH3.1 MH4.1 MH5.1 MH6.1 U1.6 U1.7 U1.10 U1.17 U1.18 U1.19

## Polygon pours and split planes (outlines as drawn)
GND on L3-PWR "L3_Ground" (solid, pour order 6): 21.65,-2734.25 21.65,-21.65 1946.85,-21.65 1946.85,-2734.25
+3.3V on L3-PWR "L3_+3.3V" (solid, pour order 4): 672,-733.51 672,-630 672,-470 736.22,-405.78 736.22,-264.22 672,-200 573,-200 488.5,-284.5 488.5,-383.5 429,-443 429,-795 610.51,-795
VIO on L4-BOT "L4_VIO" (solid, remove dead copper, pour order 7): 1244.09,-368.11 1332.68,-368.11 1352.36,-387.8 1388.78,-387.8 1398.62,-397.64 1398.62,-440.94 1390.75,-448.82 1324.8,-448.82 1303.15,-427.17 1244.09,-427.17
GND on L2-GND (split plane): 1948.41,-2735.81 20.1,-2735.81 20.1,-20.1 1948.41,-20.1

## Other copper
L4-BOT:
  rectangle net VIO: 1244.09,-427.17 1312.99,-368.11
  region net +5V: 703.82,-126.13 610.24,-126.13 610.24,-182.13 703.82,-182.13
  rectangle net +3.3V: 1245,-181.74 1282,-125.74
  region net GND: 1267,-263.74 1366,-263.74 1366,-314.74 1267,-314.74
  region net GND: 1018,-263.74 1201,-263.74 1201,-314.74 1018,-314.74
  region net GND: 768,-263.74 951,-263.74 951,-314.74 768,-314.74
  region net GND: 768,-263.74 951,-263.74 951,-314.74 768,-314.74
  region net GND: 1018,-263.74 1201,-263.74 1201,-314.74 1018,-314.74
  region net GND: 1267,-263.74 1366,-263.74 1366,-314.74 1267,-314.74
  region net GND: 603,-263.74 603,-314.74 701,-314.74 701,-263.74

## Silkscreen, mask and mechanical layers (free items; w line width, h text height)
Top Overlay:
  lines w10.5: 847.4,-217 847.5,-217 ; 858.5,-223.5 880,-236 ; 880,-274 880.1,-274 ; 880,-261 880,-236 ; 901.5,-223.5 880,-236 ; 912.9,-217 913,-217
  text "SYZYGY" at 934,-266 h40
  text "SZG-TEMPLATE-TXR / Rev A" at 762,-430 h30
Outline:
  the board outline again, w10
Mechanical:
  lines w7.87: 0,-472.44 1968.5,-472.44
  text "Carrier board edge" at 551.18,-551.18 h50
Fab Notes:
  text ":::" at 947,26 h50
  text ":::" at -39.37,-1299.21 h50 r90
  text ":::" at 2047.24,-1299.21 h50 r90
  text ":::" at 931,-2826 h50
  text "ALL UNITS IN MILLIMETERS UNLESS OTHERWISE SPECIFIED" at -362.2,-3385.83 h60
Doc-Assy-Top:
  lines w2.11: -1121.8,-2419.19 -1037.36,-2419.19 ; -1121.8,-1521.95 -1037.36,-1521.95 ; -1121.8,-624.71 -1037.36,-624.71 ; -45.11,-3231.99 -45.11,-3147.54 ; -45.11,103.64 -45.11,188.09 ; 1116.03,-3231.99 1116.03,-3147.54 ; 1116.03,103.64 1116.03,188.09 ; 1453.81,-3231.99 3353.86,-3231.99 ; 2004.04,-3147.61 2004.04,-2846.52 3269.41,-2846.52 ; 2004.04,-3046 3269.41,-3046 ; 2195,-3147.61 2195,-3046 ; 2277.17,-3231.99 2277.17,-3147.54 ; 2277.17,103.64 2277.17,188.09 ; 2491.26,-3147.61 2491.26,-3046 ; 2550.5,-3045.87 2550.5,-2846.52 ; 2929.21,-3147.61 2929.21,-3046 ; 3269.41,-2419.19 3353.86,-2419.19 ; 3269.41,-1521.95 3353.86,-1521.95 ; 3269.41,-624.71 3353.86,-624.71 ; 3353.86,-3231.99 3353.86,188.09 -1121.8,188.09 -1121.8,-3231.99 3353.86,-3231.99 ; -1037.36,-3147.54 -1037.36,103.64 3269.41,103.64 3269.41,-3147.54 -1037.36,-3147.54
  text "1" at -635.67,132.42 h29.56
  text "2" at 525.75,132.42 h29.56
  text "3" at 1684.77,132.42 h29.56
  text "4" at 2846.34,132.42 h29.56
  text "A" at -1091.46,-214.3 h29.56
  text "A" at 3302.41,-214.3 h29.56
  text "B" at -1091.46,-1111.54 h29.56
  text "B" at 3302.41,-1111.54 h29.56
  text "C" at -1091.46,-2008.78 h29.56
  text "C" at 3302.41,-2008.78 h29.56
  text "TITLE:" at 2036.84,-2879.77 h19
  text "Opal Kelly" at 2583.74,-2893.07 h29.56
  text "D" at -1091.46,-2903.91 h29.56
  text "D" at 3302.41,-2903.91 h29.56
  text "13500 SW 72nd Ave Suite 100" at 2583.74,-2942.94 h29.56
  text "SZG-TEMPLATE-TXR" at 2050.5,-2985.21 h29.56
  text "Portland, OR 97223" at 2583.74,-2984.49 h29.56
  text "www.opalkelly.com" at 2583.74,-3026.05 h29.56
  text "(Top)" at 2050.5,-3033.34 h29.56
  text "REV:" at 2027.55,-3074.15 h19
  text "SIZE:" at 2220.76,-3074.15 h19
  text "ENGINEER:" at 2516.76,-3074.15 h19
  text "DATE:" at 2954.97,-3074.15 h19
  text "A" at 2053.31,-3125.68 h29.56
  text "ANSI A" at 2246.52,-3125.68 h29.56
  text "RCA" at 2542.52,-3125.68 h29.56
  text ".PRINT_DATE" at 2980.74,-3125.68 h29.56
  text "1" at -635.67,-3205.87 h29.56
  text "2" at 525.75,-3205.87 h29.56
  text "3" at 1684.77,-3205.87 h29.56
  text "4" at 2846.34,-3205.87 h29.56
Doc-Assy-Bot:
  lines w2.11: -1122,-2419.35 -1037.57,-2419.35 ; -1122,-1522.27 -1037.57,-1522.27 ; -1122,-625.19 -1037.57,-625.19 ; -1037.22,-3045.91 227.35,-3045.91 ; -1037.22,-2846.56 227.35,-2846.56 227.35,-3147.45 ; -697.24,-3147.45 -697.24,-3045.91 ; -318.76,-3045.78 -318.76,-2846.56 ; -259.56,-3147.45 -259.56,-3045.91 ; -45.5,-3232 -45.5,-3147.57 ; -45.5,103.03 -45.5,187.46 ; 36.52,-3147.45 36.52,-3045.91 ; 777.7,-3232 -1122,-3232 ; 1115.43,-3232 1115.43,-3147.57 ; 1115.43,103.03 1115.43,187.46 ; 2276.36,-3232 2276.36,-3147.57 ; 2276.36,103.03 2276.36,187.46 ; 3268.42,-2419.35 3352.85,-2419.35 ; 3268.42,-1522.27 3352.85,-1522.27 ; 3268.42,-625.19 3352.85,-625.19 ; -1122,-3232 3352.85,-3232 3352.85,187.46 -1122,187.46 -1122,-3232 ; -1037.57,-3147.57 3268.42,-3147.57 3268.42,103.03 -1037.57,103.03 -1037.57,-3147.57
  text "4" at -614.57,131.8 h29.55
  text "3" at 546.78,131.8 h29.55
  text "2" at 1705.6,131.8 h29.55
  text "1" at 2866.81,131.8 h29.55
  text "A" at -1070.56,-214.85 h29.55
  text "A" at 3322.52,-214.85 h29.55
  text "B" at -1070.56,-1111.93 h29.55
  text "B" at 3322.52,-1111.93 h29.55
  text "C" at -1070.56,-2009.01 h29.55
  text "C" at 3322.52,-2009.01 h29.55
  text "TITLE:" at 194.58,-2879.78 h18.99
  text "Opal Kelly" at -351.98,-2893.07 h29.54
  text "D" at -1070.56,-2903.98 h29.55
  text "D" at 3322.52,-2903.98 h29.55
  text "13500 SW 72nd Ave Suite 100" at -351.98,-2942.91 h29.54
  text "Portland, OR 97223" at -351.98,-2984.44 h29.54
  text "SZG-TEMPLATE-TXR" at 180.92,-2985.15 h29.54
  text "www.opalkelly.com" at -351.98,-3025.98 h29.54
  text "(Bottom)" at 180.92,-3033.26 h29.54
  text "DATE:" at -722.98,-3074.05 h18.99
  text "ENGINEER:" at -285.31,-3074.05 h18.99
  text "SIZE:" at 10.77,-3074.05 h18.99
  text "REV:" at 203.86,-3074.05 h18.99
  text ".PRINT_DATE" at -748.73,-3125.54 h29.54
  text "RCA" at -311.05,-3125.54 h29.54
  text "ANSI A" at -14.98,-3125.54 h29.54
  text "A" at 178.12,-3125.54 h29.54
  text "4" at -614.57,-3205.89 h29.55
  text "3" at 546.78,-3205.89 h29.55
  text "2" at 1705.6,-3205.89 h29.55
  text "1" at 2866.81,-3205.89 h29.55

## Dimensions
0,-2755.91 to 1771.65,-2559.06 on MTG Locations
196.85,-2559.06 to 0,-2755.91 on MTG Locations
196.85,-2559.06 to 0,-2755.91 on MTG Locations
239.76,-275.59 to 0,0 on MTG Locations
239.76,-275.59 to 1728.74,-275.59 on MTG Locations
196.85,-669.29 to 0,0 on MTG Locations
239.76,-275.59 to 0,0 on MTG Locations
0,0 to 0,-2755.91 on Dimensions
0,0 to 1968.5,0 on Dimensions

## Text inside footprints (layer, text, board x,y; h text height)
*: Top Overlay "TXR4" at 116.23,-106.3 h48